# Altium PCB 电子脚铐手表主控板V3-改版.PcbDoc
Units mil, origin at the board's own origin, x right, y up, seen from the top; angles counter-clockwise.
Board outline 1259.84 x 1023.62 mil, 2 copper layers (Top Layer, Bottom Layer), stack 42.17 mil thick; 41 components, 29 nets, 164 pads, 44 vias.
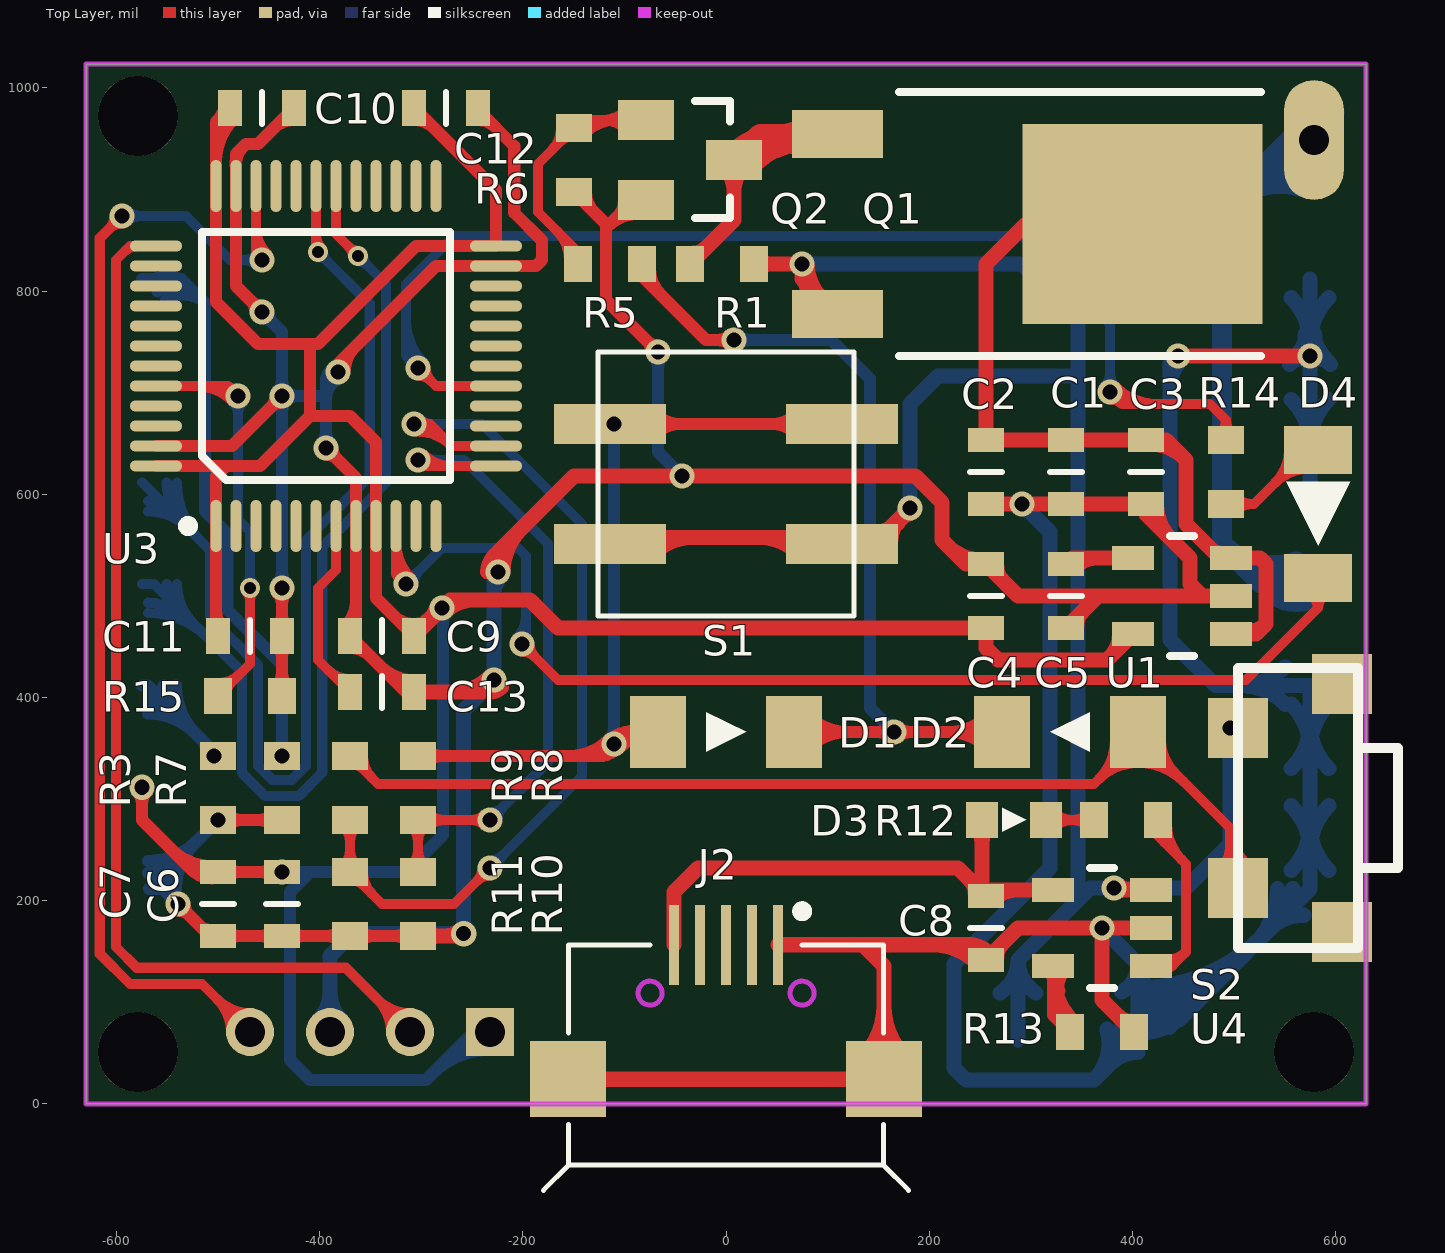
[diagram p0: Top Layer view]
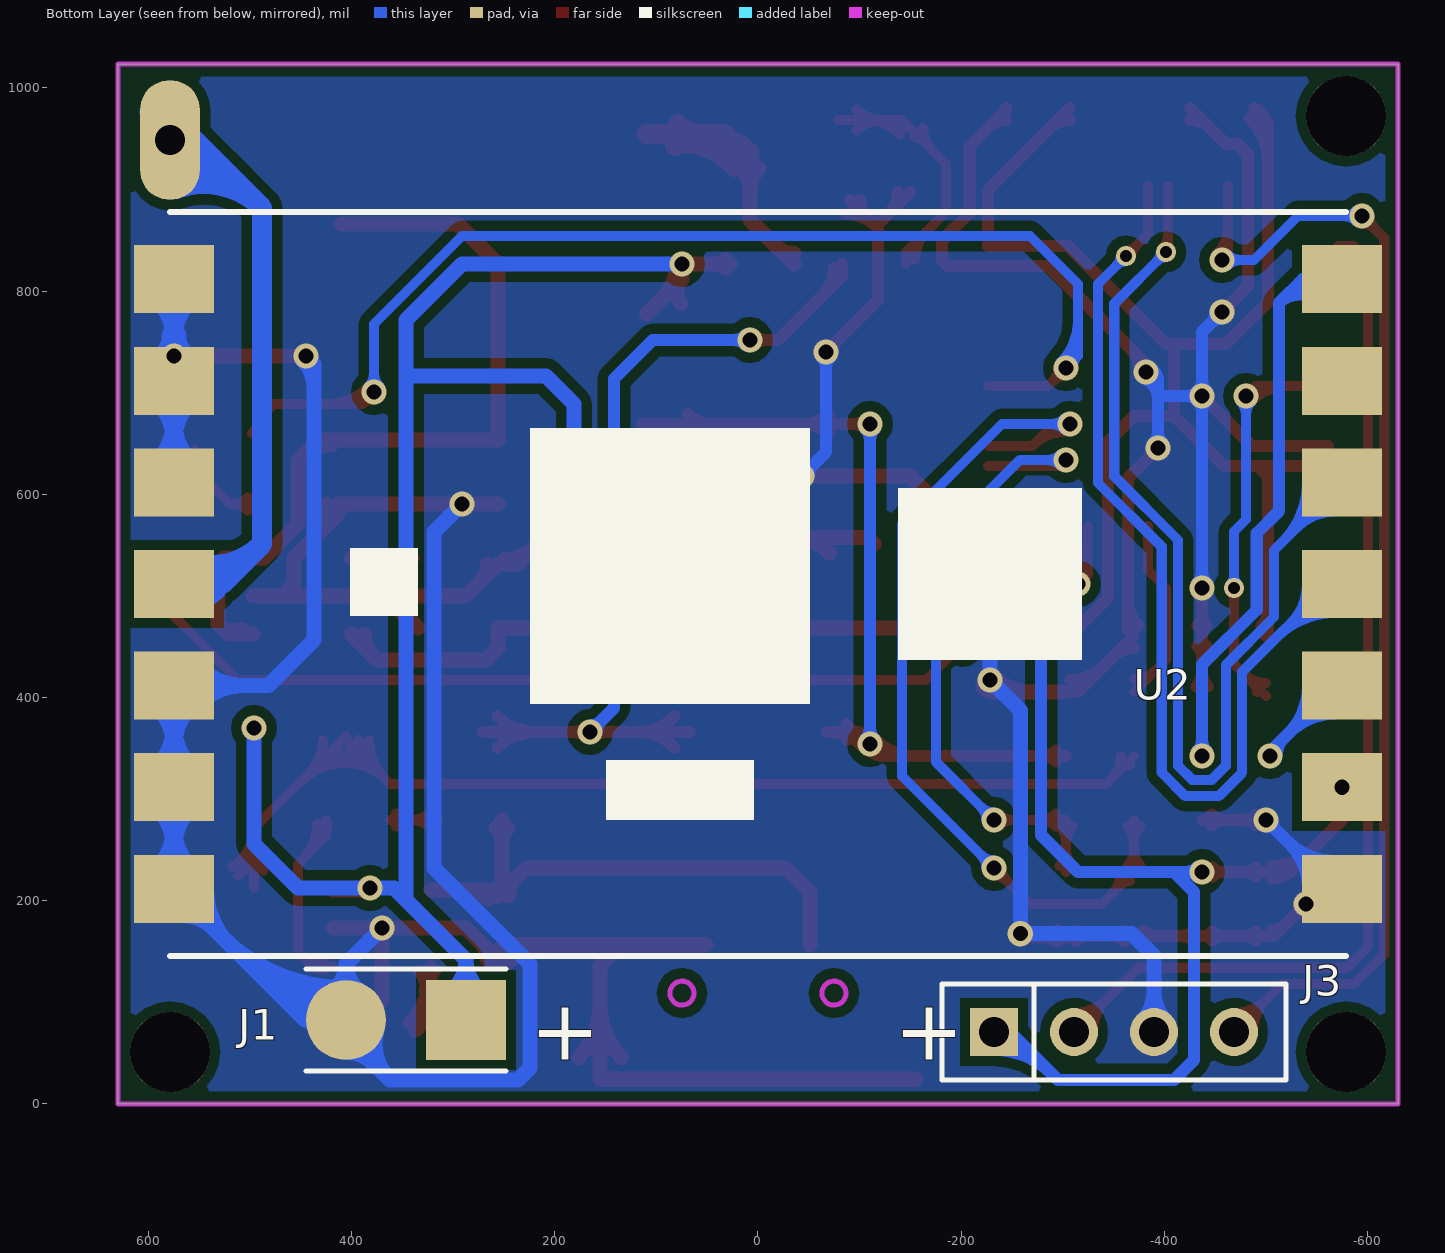
[diagram p1: Bottom Layer view, seen from below]
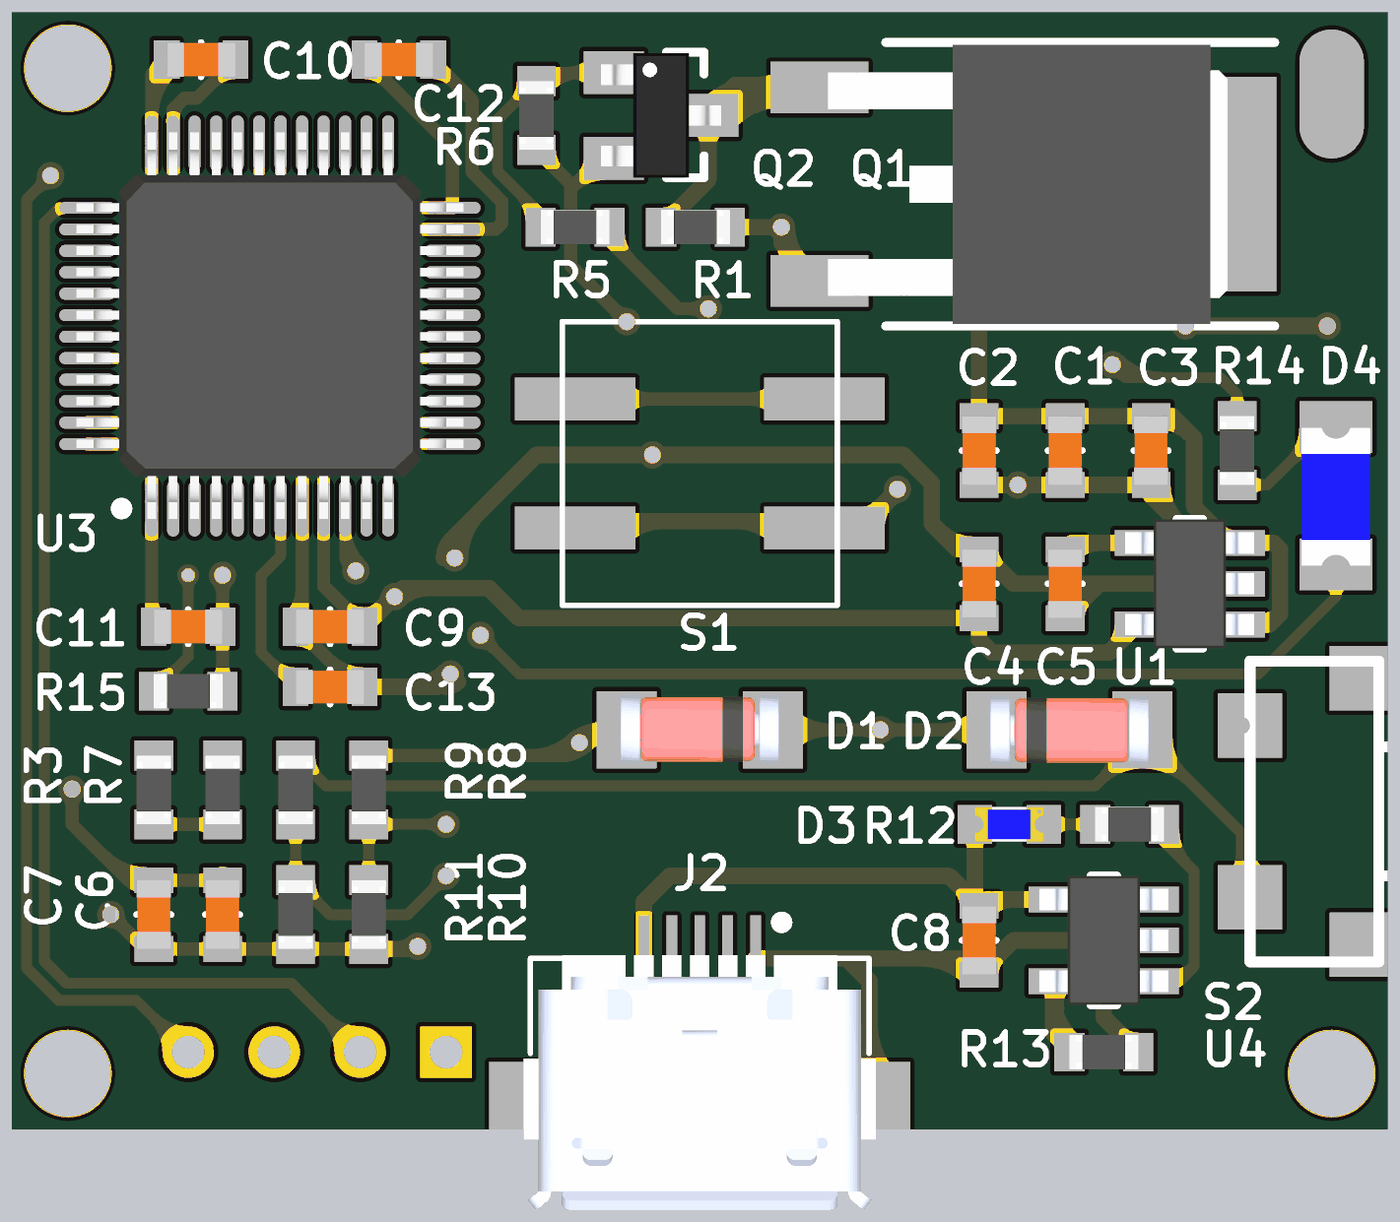
[diagram p2: 3D render of the assembled board from above, using the file's embedded part models]

## Layer stack, top to bottom
Top Solder: solder mask 0.4, Solder Resist, Dk 3.5
Top Layer: signal copper 1.4
Dielectric 1: dielectric 39.3701, FR-4, Dk 4.8
Bottom Layer: signal copper 1.4
Bottom Solder: solder mask 0.4, Solder Resist, Dk 3.5

## Board outline
-629.92,0 629.92,0 629.92,1023.62 -629.92,1023.62

## Design rules (kind name [scope] priority, off if disabled: settings)
Clearance [All] p1: gap=6
ComponentClearance [All] p1: gap=0 collisioncheckmode=3 verticalgap=0 showdistances=FALSE
Height [All] p1: minheight=0 maxheight=2000 prefheight=500
HoleSize [All] p1: absolutevalues=TRUE maxlimit=200 minlimit=1 maxpercent=80.000 minpercent=20.000
HoleToHoleClearance [All] p1: gap=6 allowstackedmicrovias=TRUE
MinimumSolderMaskSliver [All] p1: minsoldermaskwidth=0
PlaneConnect [All] p1: planeconnectstyle=Direct reliefexpansion=20 reliefentries=4 reliefconductorwidth=10 reliefairgap=10
PolygonConnect [All] p1: connectstyle=Direct reliefconductorwidth=10 reliefentries=4 polygonreliefangle="90 Angle" airgapwidth=10
RoutingVias [All] p1: holewidth=28 width=50 viastyle="Through Hole" minholewidth=8 minwidth=12 maxholewidth=200 maxwidth=300
SilkToSilkClearance [All] p1: silktosilkclearance=0
SilkToSolderMaskClearance [IsPad] p1: minsilkscreentomaskgap=0 clearancetoexposedcopper=TRUE
SolderMaskExpansion [All] p1: expansion=4
Width [All] p1: maxlimit=20 minlimit=10 preferedwidth=10
21 further rules are at their usual default settings.

## Components (designator, comment, footprint, x,y, rotation, side; value= is the part's Value field where it differs from the comment)
C1 "10uF" C0603 334.65,622.05 r270 top locked
C2 "10uF" C0603 255.91,622.05 r270 top locked
C3 "0.1uF" C0603 413.39,622.05 r90 top locked
C4 "10uF" C0603 255.91,500 r90 top locked
C5 "470pF" C0603 334.65,500 r270 top locked
C6 "10uF" C0603 -437.01,196.85 r270 top locked
C7 "0.1uF" C0603 -500,196.85 r270 top locked
C8 "10uF" C0603 255.91,173.23 r270 top locked
C9 "0.1uF" C0603 -338.58,460.63 r180 top locked
C10 "0.1uF" C0603 -456.69,980.31 r0 top locked
C11 "0.1uF" C0603 -468.5,460.63 r0 top locked
C12 "0.1uF" C0603 -275.59,980.31 r0 top locked
C13 "0.1uF" C0603 -338.58,405.51 r0 top locked
D1 "1N4148" SOD-80-S 0,366.14 r0 top
D2 "1N4148" SOD-80-S 338.58,366.14 r180 top locked
D3 "LED-G" LED0603 283.46,279.53 r0 top locked
D4 "LED" Led1206 582.68,580.71 r270 top locked
J1 "Jack 1x2" JK1*2-2.0 346.46,82.68 r0 bottom locked
J2 "MicroUSB" MICRO-USB 0,90.55 r180 top locked
J3 "SHD1X4-2.00" Jk1*4-2.0 -350.39,70.87 r180 bottom
Q1 "2SA1615" TO-252 259.84,866.14 r270 top locked
Q2 "S8050" SOT-23 -35.43,929.13 r270 top locked
R1 "200K" R0603 -3.94,826.77 r180 top locked
R3 "200K" R0603 -500,311.02 r270 top locked
R5 "20K" R0603 -114.17,826.77 r180 top locked
R6 "10K" R0603 -149.61,929.13 r270 top locked
R7 "200K" R0603 -437.01,311.02 r270 top locked
R8 "200K" R0603 -303.15,311.02 r270 top locked
R9 "200K" R0603 -370.08,311.02 r270 top locked
R10 "100K" R0603 -303.15,196.85 r90 top locked
R11 "100K" R0603 -370.08,196.85 r90 top locked
R12 "1K" R0603 393.7,279.53 r180 top locked
R13 "1.65K" R0603 370.08,70.87 r180 top locked
R14 "1K" R0603 492.13,622.05 r270 top locked
R15 "100K" R0603 -468.5,401.57 r0 top locked
S1 "Switch" TS-1110U 0,610.24 r180 top locked
S2 "Switch" SIDE_BUTTON 503.94,429.13 r0 top
U1 "MIC5219-3.3YM5" SOT-23-5 448.82,500 r180 top locked
U2 "YL-800TS" YL-800TS 0,511.81 r0 bottom locked
U3 "STM32F103CB" LQFP48 -393.7,736.22 r90 top locked
U4 "SE9016" SOT-23-5 370.08,173.23 r180 top locked

## Footprints (in the part's own frame and the unit in brackets; to place one, negate y for a bottom-side part, rotate by r counter-clockwise, add the part's x,y. Pads: shape width x height; smd on the part's side, far side on the other; paste and mask are expansions set on the pad)
C0603 [mm]
  rect 0.6x0.9 smd: 1(-0.8,0) 2(0.8,0)
  silkscreen extent 0,-0.4 0,0.4, body extent -0.8,-0.4 0.8,0.4, height 0.5
JK1*2-2.0 [mm]
  rect 2x2 smd: 1(-1.5,0)
  round 2 smd: 2(1.5,0)
  silkscreen extent -2.5,-1.27 2.5,1.27
Jk1*4-2.0 [mm] "4P，直插，2.0mm间距，排母"
  rect 1.2x1.2 hole 0.762: 1(-3,0)
  round 1.2 hole 0.762: 2(-1,0) 3(1,0) 4(3,0)
  silkscreen extent -4.3,-1.2 4.3,1.2, body extent -4.25,-1.22 4.25,1.18, height 4.3
LED0603 [mm]
  rect 0.8x0.9 smd: 1(-0.8,0) 2(0.8,0)
  silkscreen extent -0.3,-0.3 0.3,0.3, body extent -0.8,-0.4 0.8,0.4, height 0.6
Led1206 [mm]
  rect 1.2x1.7 smd: 1(-1.6,0) 2(1.6,0)
  silkscreen extent -0.8,-0.8 0.8,0.8, body extent -1.57,-0.8 1.63,0.8, height 1.1
LQFP48 [mm]
  oval 1.3x0.28 smd: 1(-4.25,2.75) 2(-4.25,2.25) 3(-4.25,1.75) 4(-4.25,1.25) 5(-4.25,0.75) 6(-4.25,0.25) 7(-4.25,-0.25) 8(-4.25,-0.75) 9(-4.25,-1.25) 10(-4.25,-1.75) 11(-4.25,-2.25) 12(-4.25,-2.75) 25(4.25,-2.75) 26(4.25,-2.25) 27(4.25,-1.75) 28(4.25,-1.25) 29(4.25,-0.75) 30(4.25,-0.25) 31(4.25,0.25) 32(4.25,0.75) 33(4.25,1.25) 34(4.25,1.75) 35(4.25,2.25) 36(4.25,2.75)
  oval 0.28x1.3 smd: 13(-2.75,-4.25) 14(-2.25,-4.25) 15(-1.75,-4.25) 16(-1.25,-4.25) 17(-0.75,-4.25) 18(-0.25,-4.25) 19(0.25,-4.25) 20(0.75,-4.25) 21(1.25,-4.25) 22(1.75,-4.25) 23(2.25,-4.25) 24(2.75,-4.25) 37(2.75,4.25) 38(2.25,4.25) 39(1.75,4.25) 40(1.25,4.25) 41(0.75,4.25) 42(0.25,4.25) 43(-0.25,4.25) 44(-0.75,4.25) 45(-1.25,4.25) 46(-1.75,4.25) 47(-2.25,4.25) 48(-2.75,4.25)
  silkscreen extent -4.37,-3.1 3.1,3.57, body extent -4.49,-4.5 4.51,4.5, height 1.8
MICRO-USB [mm]
  rect 0.25x2 smd: 1(1.3,-1.679) 2(0.65,-1.679) 3(0,-1.679) 4(-0.65,-1.679) 5(-1.3,-1.679)
  rect 1.9x1.9 smd: 5(-3.95,1.679) 5(3.95,1.679)
  Keep-Out Layer circle w0.127: c-1.9,-0.471 r0.3
  Keep-Out Layer circle w0.127: c1.9,-0.471 r0.3
  silkscreen extent -4.57,-2.64 4.57,4.46, body extent -4.1,-1.75 4.1,4.18, height 2.77
R0603 [mm]
  rect 0.7x0.9 smd: 1(-0.8,0) 2(0.8,0)
  body extent -0.8,-0.4 0.8,0.4, height 0.37
SIDE_BUTTON [mm] "SMD Button Side Activated"
  rect 1.5x1.5 smd: 1(0,-1.5) 2(0,-5.5) ""(2.6,-6.6) ""(2.6,-0.4)
  silkscreen extent 0,-7 4,0, body extent 0,-7 4,0, height 3.5
SOD-80-S [mm]
  rect 1.4x1.8 smd: 1(-1.7,0) 2(1.7,0)
  silkscreen extent -0.5,-0.5 0.5,0.5, body extent -1.85,-0.79 1.85,0.81, height 1.6
SOT-23 [mm]
  rect 1x1.4 smd: 1(-1,-1.1) 2(1,-1.1) 3(0,1.1)
  silkscreen extent -1.47,0.13 1.45,1, body extent -1.45,-1.4 1.45,1.4, height 1.3
SOT-23-5 [mm]
  rect 1.05x0.6 smd: 1(-1.225,0.95) 2(-1.225,0) 3(-1.225,-0.95) 4(1.225,-0.95) 5(1.225,0.95)
  silkscreen extent -0.3,-1.5 0.3,1.5, body extent -1.5,-1.5 1.5,1.5, height 1.2
TO-252 [mm]
  rect 1.2x2.28 smd: 1(-2.25,-3.816) 3(2.25,-3.816)
  rect 5x6 smd: 2(0,3.816)
  silkscreen extent -3.3,-2.27 3.3,6.78, body extent -3.25,-3.62 3.25,5.68, height 2.3
TS-1110U [mm]
  rect 2.8x1 smd: 1(-2.9,1.5) 1(2.9,1.5) 2(-2.9,-1.5) 2(2.9,-1.5)
  silkscreen extent -3.2,-3.3 3.2,3.3, body extent -3.2,-3.3 3.2,3.3, height 4.95
YL-800TS [mm]
  rect 2x1.7 smd: 1(-14.6,7.62) 2(-14.6,5.08) 3(-14.6,2.54) 4(-14.6,0) 5(-14.6,-2.54) 6(-14.6,-5.08) 7(-14.6,-7.62) 8(14.6,-7.62) 9(14.6,-5.08) 10(14.6,-2.54) 11(14.6,0) 12(14.6,2.54) 13(14.6,5.08) 14(14.6,7.62)
  silkscreen extent -14.7,-9.3 14.7,9.3, body extent -14.7,-9.3 14.7,9.3, height 2.3

## Part data
C1 C2 C4 C5 C6 C7: library part CAP, "CAP"
C3 C9 C10 C11 C12 C13: library part "Cap Semi"
C8: library part Cap, "Capacitor"
D1 D2: library part DIODE-SWITCHING, "Silicon Epitaxial Planar Diodes"
D3: library part LED
J1: "插座"
J3: library part HEADER1X4
Q1: library part MJD122
Q2: "NPN triode, 0.5A Max"
R1 R5 R6 R8 R9 R15: library part Res
R3 R7 R10 R11: library part RES, "Resistor"
R12 R13 R14: library part Res, "Resistor"
S1 S2: library part Sw
U1: library part MIC5205
U3: library part STM32F103Cx

## Free pads (board coordinates)
  round 78.74 hole 78.74: ""(-578.74,51.18) ""(-578.74,972.44) ""(578.74,51.18)
  oval 59.06x118.11 smd: ""(578.74,948.82)
  oval 59.06x118.11 smd far side: ""(578.74,948.82)

## Via types
v1: diameter 25, hole 15, Top Layer to Bottom Layer, tented both sides, 40 vias
v2: diameter 20, hole 12, Top Layer to Bottom Layer, tented both sides, 3 vias
v3: diameter 50, hole 30, Top Layer to Bottom Layer, tented both sides, 1 vias

## Nets (pads, with @x,y where several pads share a name; then routed paths per layer and width w, separated by ;. In a path a pad name is that pad's centre, name@x,y a point inside that pad or via, vN(x,y) a via of type N, cw(c..) or ccw(c..) an arc to the next point about the centre after c; other vN are vias at no path point)
+3.3V: C4.1 C6.1 C7.1 C9.1 C10.1 C11.1 C12.1 J3.1 U1.5 U2.2 U3.1 U3.9 U3.24 U3.36 U3.48 | length 3751.4
  Top Layer w12: v1@-579.4,307.21 cw(c-590.5,296.12) -574.8,296.12 cw(c-559.11,296.12) v1@-570.21,307.21 ; v1(-574.8,311.81) -574.8,279.53 -523.62,228.35 C7.1 v1(-437.01,228.35) ; U3.48 -492.13,627.95 ; -546.07,250.79 ccw(c-505.91,290.96) C7.1@-505.91,234.16 ; -525.58,230.31 ccw(c-505.91,249.99) C7.1@-505.91,222.16 ; C7.1@-510.01,224.24 ccw(c-519.93,214.32) -519.93,228.35 ccw(c-519.93,242.38) C7.1@-510.01,232.46 ; -501.97,485.32 ccw(c-481.22,485.32) C11.1@-495.89,470.64 ; U3.36@-501.97,927.11 cw(c-440.89,927.11) C10.1@-484.08,970.3 ; -501.97,956.08 cw(c-469.86,956.08) C10.1@-492.57,978.79 ; C11.1 -501.97,462.6 U3.1 -501.97,618.11 -492.13,627.95 ; C10.1@-490.29,968.99 ccw(c-494.25,958.82) -501.97,966.54 ; C7.1@-489.99,224.24 cw(c-480.07,214.32) -480.07,228.35 cw(c-480.07,242.38) C7.1@-489.99,232.46 ; C10.1 -501.97,966.54 ; C6.1@-447.02,224.24 ccw(c-456.94,214.32) -456.94,228.35 ccw(c-456.94,242.38) C6.1@-447.02,232.46 ; C6.1@-441.61,223.75 ccw(c-452.7,212.65) -452.7,228.35 ccw(c-452.7,244.04) C6.1@-441.61,232.94 ; -327.09,480.63 ccw(c-307.09,500.63) C9.1@-307.09,472.35 ; C9.1 -344.49,498.03 U3.9 -344.49,651.57 -370.08,677.17 -409.45,677.17 ; C12.1@-307.09,968.6 cw(c-307.09,940.31) -287.09,960.31 ; C12.1 -226.38,899.61 U3.24 -305.12,844.49 -401.57,748.03 -409.45,748.03 ; -501.97,966.54 U3.36 -501.97,789.37 -460.63,748.03 -409.45,748.03 ; -492.13,627.95 -458.66,627.95 -409.45,677.17 ; -409.45,677.17 -409.45,748.03
  Top Layer w15: C9.1 v1(-279.53,488.19) -271.65,496.06 -192.91,496.06 -165.35,468.5 C4.1 255.91,448.82 267.72,437.01 375,437.01 U1.5 ; C9.1@-307.09,470.85 ccw(c-307.09,495.51) -289.65,478.07 ; C9.1@-295.87,474.48 ccw(c-308.23,495.88) v1@-284.36,489.48 ; -291.5,477 ccw(c-298.49,489.11) v1@-284.52,488.43 ; v1@-275.99,484.65 cw(c-248.45,457.11) -248.45,496.06 ; 378.11,440.12 ccw(c355.63,462.6) U1.5@387.42,462.6
  Bottom Layer w12: v1(-437.01,228.35) -409.45,228.35 ; v1@-432.41,223.75 cw(c-421.32,212.65) -421.32,228.35 cw(c-421.32,244.04) v1@-432.41,232.94 ; -289.25,29.65 cw(c-232.28,-27.32) J3.1@-232.28,53.24 ; v1@-284.12,483.59 cw(c-297.34,470.38) -278.65,470.38 ; -278.65,474.62 cw(c-265.95,474.62) v1@-274.93,483.59 ; v1@-271.65,492.12 -278.65,485.13 -278.65,264.66 -314.96,228.35 -409.45,228.35 ; -268.76,50.13 cw(c-232.28,13.65) J3.1@-232.28,65.24 ; J3.1@-248.03,70.87 -295.28,23.62 -409.45,23.62 -429.13,43.31 -429.13,208.66 -409.45,228.35
AD_KEY1: R8.2 R10.2 U3.13 | length 874.2
  Top Layer w10: R10.2@-309.36,234.55 ccw(c-324.35,249.54) -303.15,249.54 ccw(c-281.95,249.54) R10.2@-296.94,234.55 ; R8.2@-309.36,273.32 cw(c-324.35,258.33) -303.15,258.33 cw(c-281.95,258.33) R8.2@-296.94,273.32 ; R10.2 R8.2 v1(-232.28,279.53) ; v1(-303.15,633.86) -297.24,627.95 U3.13 ; v1@-297.85,639.16 ccw(c-270.79,666.22) -270.79,627.95 ; R8.2@-293,273.32 cw(c-278.02,258.33) -278.02,279.53 cw(c-278.02,300.72) R8.2@-293,285.74 ; v1@-237.59,274.22 ccw(c-250.39,261.42) -250.39,279.53 ccw(c-250.39,297.63) v1@-237.59,284.83
  Bottom Layer w10: v1(-303.15,633.86) -257.78,633.86 -175.1,551.18 -175.1,336.71 v1(-232.28,279.53) ; v1@-297.85,628.55 cw(c-285.04,615.75) -285.04,633.86 cw(c-285.04,651.96) v1@-297.85,639.16 ; v1@-232.28,287.03 ccw(c-232.28,305.13) -219.48,292.33 ccw(c-206.68,279.53) v1@-224.78,279.53
AD_KEY2: R9.2 R11.2 U3.14 | length 1161.2
  Top Layer w10: R11.2@-376.29,234.55 ccw(c-391.27,249.54) -370.08,249.54 ccw(c-348.88,249.54) R11.2@-363.87,234.55 ; R9.2@-376.29,273.32 cw(c-391.27,258.33) -370.08,258.33 cw(c-348.88,258.33) R9.2@-363.87,273.32 ; R9.2 R11.2 -338.59,196.86 -267.71,196.86 v1(-232.28,232.28) ; R11.2@-366.14,219.57 cw(c-366.14,207.88) R11.2@-357.88,216.14 ; R11.2@-357.36,228.35 ccw(c-326.66,228.35) -348.37,206.64 ; v1@-307.22,671.79 cw(c-305.68,643.33) -285.53,663.48 ; v1(-307.09,669.29) -291.34,669.29 ; v1@-306.68,661.8 cw(c-304.05,613.28) -269.69,647.64 ; v1@-301.26,664.56 cw(c-291.34,656.51) -291.34,669.29 ; v1@-301.26,674.02 ccw(c-291.34,682.07) -291.34,669.29 ; v1@-239.78,232.28 cw(c-257.89,232.28) -245.09,219.48 cw(c-232.28,206.68) v1@-232.28,224.78 ; U3.14 -269.69,647.64 ; -291.34,669.29 -269.69,647.64
  Bottom Layer w10: v1(-307.09,669.29) -240.16,669.29 -141.73,570.87 -141.73,322.83 v1(-232.28,232.28) ; v1@-301.78,663.99 cw(c-288.98,651.18) -288.98,669.29 cw(c-288.98,687.4) v1@-301.78,674.59 ; v1@-232.28,239.78 ccw(c-232.28,257.89) -219.48,245.09 ccw(c-206.68,232.28) v1@-224.78,232.28
ANT: pad.@578.74,948.82 U2.11 | length 1189.9
  Bottom Layer w20: 510.59,904.3 cw(c556.98,857.91) pad.@578.9,919.74 ; 510.98,528.39 ccw(c550.1,567.51) U2.11@567.79,515.09 ; 512.81,906.51 cw(c578.74,840.58) pad.@578.74,933.82 ; 533,926.7 cw(c568.71,890.99) pad.@585.58,938.59 ; 533.76,505.61 ccw(c561.6,533.44) U2.11@574.19,496.14 ; 546.95,940.65 cw(c578.74,908.86) pad.@578.74,953.82 ; U2.11@548.75,499.78 ccw(c527.56,487.13) 527.56,511.81 ; U2.11@548.75,523.84 cw(c527.56,536.49) 527.56,511.81 ; pad.@555.4,949.1 cw(c580.44,924.07) pad.@592.27,957.44 ; U2.11@561.39,534.04 cw(c538.6,601.59) 488.19,551.18 ; pad.@572.21,900.89 ccw(c545.25,824.83) 488.19,881.89 ; U2.11 527.56,511.81 ; pad.@577.81,971.51 cw(c592.16,957.15) pad.@598.95,976.29 ; pad.@578.74,972.44 488.19,881.89 ; 488.19,551.18 488.19,881.89 ; 488.19,551.18 527.56,511.81
  other v3: 578.74,948.82
BAT: J1.1 Q1.3 R1.1 S1.1 S2.1 U4.3 | length 2383.2
  Top Layer w15: S1.1@-114.17,551.18 -107.86,557.5 107.86,557.5 114.17,551.18 145.67,551.18 v1(181.1,586.61) ; S1.1@-70.12,542.56 cw(c-34.08,506.52) -34.08,557.5 ; R1.1 v1(74.8,826.77) 74.8,812.36 ; R1.1@32,822.33 cw(c42.72,811.61) 42.72,826.77 cw(c42.72,841.93) R1.1@32,831.21 ; 34.08,557.5 cw(c34.08,506.52) S1.1@70.12,542.56 ; Q1.3@75.94,787.86 ccw(c61.93,799.48) 74.8,812.36 ; v1@79.8,826.77 ccw(c126.66,826.77) Q1.3@93.53,793.64 ; Q1.3 74.8,812.36 ; S1.1@149.61,563.37 ccw(c149.61,583.28) S1.1@163.69,569.2 ; S1.1@161.79,551.18 cw(c200.71,551.18) v1@173.19,578.7 ; 169.06,571.55 cw(c188.08,560.58) v1@182.4,581.78 ; v1(381.89,212.6) 379.92,210.63 U4.3 ; v1@385.43,216.13 ccw(c398.71,229.42) U4.3@398.71,210.63
  Bottom Layer w15: v1(74.8,826.77) 291.34,826.77 346.46,771.65 346.46,716.54 ; v1(181.1,586.61) 181.1,688.98 208.66,716.54 346.46,716.54 ; J1.1@269.91,109.32 ccw(c248.63,141.73) 287.4,141.73 ; J1.1@287.4,62.99 287.4,141.73 ; J1.1@304.89,109.32 cw(c326.18,141.73) 287.4,141.73 ; v1(496.06,370.08) 496.06,255.91 452.76,212.6 v1(381.89,212.6) 358.27,212.6 346.46,200.79 ; 287.4,141.73 346.46,200.79 ; 346.46,200.79 346.46,716.54
BATOUT: C1.1 C2.1 C3.2 Q1.2 U1.1 U1.3 | length 876.8
  Top Layer w15: Q1.2 295.28,866.14 255.91,826.77 C2.1 C1.1 C3.2 433.07,653.54 452.76,633.86 452.76,570.87 486.22,537.4 U1.3 525.59,537.4 531.5,531.5 531.5,472.44 ; C3.2@419.29,649.23 cw(c419.29,605.56) 450.17,636.44 ; U1.3@477.47,546.15 ccw(c488.19,556.87) U1.3@488.19,541.71 ; U1.1 521.65,462.6 531.5,472.44 ; U1.1@507.26,466.69 ccw(c514.72,489.22) 531.5,472.44
BOOT0: R15.1 U3.44 | length 578
  Top Layer w10: U3.44 -490.16,706.69 ; -522.18,706.69 cw(c-522.18,654.98) v1@-485.62,691.55 ; R15.1 -468.5,433.07 v2(-468.5,507.87) ; R15.1@-500,414.29 ccw(c-500,444.99) -478.29,423.28 ; -498.04,706.69 cw(c-498.04,679.12) v1@-478.55,698.62 ; R15.1@-491.22,405.51 cw(c-479.53,405.51) R15.1@-487.8,413.78 ; v1@-487.66,698.36 ccw(c-496.64,700.21) -490.16,706.69 ; v1@-481.83,704.2 cw(c-483.68,713.17) -490.16,706.69 ; v1(-480.31,696.85) -490.16,706.69 ; v2@-472.04,504.34 cw(c-480.57,495.8) -468.5,495.8 cw(c-456.43,495.8) v2@-464.97,504.34
  Bottom Layer w10: v1@-485.62,691.55 cw(c-498.42,678.74) -480.31,678.74 cw(c-462.21,678.74) v1@-475.01,691.55 ; v1(-480.31,696.85) -480.31,575.22 -468.5,563.41 v2(-468.5,507.87) ; v2@-472.04,511.41 ccw(c-480.57,519.95) -468.5,519.95 ccw(c-456.43,519.95) v2@-464.97,511.41
GND: C1.2 C2.2 C3.1 C4.2 C5.2 C6.2 C7.2 C8.2 C9.2 C10.2 C11.2 C12.2 C13.2 J1.2 J2.5 J3.3 Q2.2 R3.2 R6.2 R7.2 R10.1 R11.1 R13.1 R15.2 U1.2 U2.1 U2.8 U2.9 U2.10 U2.12 U2.13 U2.14 U3.8 U3.23 U3.35 U3.47 U4.2 | length 10859.6
  Top Layer w12: U3.47 -486.22,647.64 v1(-437.01,696.85) ; v1@-539.37,190.35 cw(c-539.37,174.66) -528.27,185.75 cw(c-517.18,196.85) v1@-532.87,196.85 ; v1(-539.37,196.85) -507.87,165.35 C7.2 C6.2 R11.1 R10.1 ; -519.19,176.67 ccw(c-505.91,189.95) C7.2@-505.91,171.17 ; v1(-500,279.53) R7.2 ; R3.2@-495.4,274.93 cw(c-484.3,263.83) -484.3,279.53 cw(c-484.31,295.21) R3.2@-495.4,284.12 ; R3.2@-490.56,274.03 cw(c-477.28,260.75) -477.28,279.53 cw(c-477.28,298.31) R3.2@-490.56,285.03 ; C7.2@-489.99,161.25 cw(c-480.07,151.33) -480.07,165.35 cw(c-480.07,179.38) C7.2@-489.99,169.46 ; U3.35@-482.77,923.62 cw(c-456.39,923.62) -475.04,942.28 ; v1@-463.19,779.53 ccw(c-478.89,779.53) -467.79,790.62 ccw(c-456.69,801.72) v1@-456.69,786.03 ; v1(-456.69,779.53) -482.28,805.12 U3.35 -482.28,935.04 -472.44,944.88 -460.63,944.88 C10.2 ; C6.2@-447.02,161.25 ccw(c-456.94,151.33) -456.94,165.35 ccw(c-456.94,179.38) C6.2@-447.02,169.46 ; R7.2@-446.45,274.03 ccw(c-459.73,260.75) -459.73,279.53 ccw(c-459.73,298.31) R7.2@-446.45,285.03 ; -445.2,960.31 cw(c-425.2,940.31) C10.2@-425.2,968.6 ; v1@-443.51,696.85 cw(c-459.2,696.85) -448.1,685.75 cw(c-437.01,674.66) v1@-437.01,690.35 ; R15.2@-442.51,411.01 ccw(c-455.79,424.29) -437.01,424.29 ccw(c-418.23,424.29) R15.2@-431.51,411.01 ; v1@-441.6,503.28 cw(c-452.7,492.18) -437.01,492.18 cw(c-421.32,492.18) v1@-432.41,503.28 ; C11.2@-441.12,450.62 cw(c-451.04,440.7) -437.01,440.7 cw(c-422.98,440.7) C11.2@-432.9,450.62 ; C11.2@-441.12,470.64 ccw(c-451.04,480.56) -437.01,480.56 ccw(c-422.98,480.56) C11.2@-432.9,470.64 ; R15.2 v1(-437.01,507.87) ; C6.2@-426.99,161.25 cw(c-417.07,151.33) -417.07,165.35 cw(c-417.07,179.38) C6.2@-426.99,169.46 ; v1@-393.7,639.17 cw(c-393.7,623.48) -382.6,634.57 cw(c-371.51,645.67) v1@-387.2,645.67 ; v1(-393.7,645.67) -364.17,616.14 U3.8 -364.17,466.54 C9.2 -314.96,405.51 C13.2 C13.2@-299.21,405.51 ; v1(-381.89,720.47) -381.89,728.35 -285.43,824.8 U3.23 -187.01,824.8 -181.1,830.71 -181.1,849.97 -208.38,877.25 -208.38,942.78 -244.09,978.49 C12.2 ; R11.1@-379.52,159.85 ccw(c-392.8,146.57) -392.8,165.35 ccw(c-392.8,184.14) R11.1@-379.52,170.86 ; v1@-375.39,720.47 cw(c-340.69,720.47) -365.23,745.01 ; C9.2@-374.19,470.64 ccw(c-398.37,494.82) -364.17,494.82 ; C9.2@-370.08,448.91 cw(c-370.08,420.63) -350.08,440.63 ; R11.1@-360.64,159.85 cw(c-347.36,146.57) -347.36,165.35 cw(c-347.36,184.14) R11.1@-360.64,170.86 ; -340.53,431.08 ccw(c-307.09,464.52) C13.2@-307.09,417.23 ; -320.04,410.6 ccw(c-307.09,423.55) C13.2@-307.09,405.23 ; R10.1@-312.59,159.85 ccw(c-325.87,146.57) -325.87,165.35 ccw(c-325.87,184.14) R10.1@-312.59,170.86 ; C12.2@-244.09,968.6 cw(c-244.09,944.71) -227.2,961.6 ; R6.2 -118.11,866.14 -118.11,862.2 ; R6.2@-137.89,897.64 ccw(c-109.6,897.64) -129.6,877.64 ; -116.7,863.62 cw(c-86.61,833.54) Q2.2@-86.61,876.08 ; -107.19,873.12 ccw(c-123.83,889.76) Q2.2@-100.3,889.76 ; Q2.2@-90.55,889.76 -118.11,862.2 ; v1@-73.43,740.16 ccw(c-89.12,740.16) -78.03,751.25 ccw(c-66.93,762.35) v1@-66.93,746.66 ; v1(-66.93,740.16) -118.11,791.34 -118.11,862.2
  Top Layer w15: R10.1 -260.66,165.35 v1(-258.28,167.73) ; C13.2@-299.21,405.51 -240.16,405.51 v1(-228.35,417.32) ; R10.1@-294.77,160.91 cw(c-284.05,150.19) -284.05,165.35 cw(c-284.05,180.51) R10.1@-294.77,169.79 ; -276.1,165.35 ccw(c-276.1,185.54) v1@-261.82,171.27 ; -268.93,405.51 ccw(c-268.93,457.91) v1@-231.88,420.86 ; v1@-234.41,523.62 cw(c-211.03,523.62) -227.56,540.16 ; -232.72,405.51 ccw(c-232.72,421.69) v1@-221.28,410.25 ; v1(-224.41,523.62) -224.41,543.31 -149.61,618.11 v1(-43.31,618.11) 186.38,618.11 212.6,591.89 212.6,555.12 236.22,531.5 C4.2 287.4,500 366.14,500 ; v1@-219.41,523.62 cw(c-159.81,523.62) -201.95,565.76 ; J2.5@-155.51,24.45 155.51,24.45 155.51,135.83 134.69,156.65 ; J2.5@51.18,156.65 134.69,156.65 ; J2.5@134.37,45.59 ccw(c83.32,96.64) 155.51,96.64 ccw(c227.7,96.64) J2.5@176.66,45.59 ; 203.57,156.65 cw(c203.57,95.3) C8.2@246.95,138.68 ; 219.12,548.6 ccw(c250,579.48) C4.2@250,535.81 ; 239.78,156.65 cw(c239.78,131.52) C8.2@257.56,149.29 ; C8.2@245.73,142.35 ccw(c229.1,144.77) 240.99,156.65 ; C2.2 v1(291.34,590.55) C1.2 C3.1 413.39,580.54 456.69,537.23 456.69,511.81 468.5,500 ; C8.2@266.12,141.73 cw(c290.79,141.73) 273.35,159.17 ; C4.2@266.12,531.5 ccw(c290.79,531.5) 273.35,514.06 ; C5.2 366.14,500 ; C5.2@344.86,468.5 cw(c369.53,468.5) 352.09,485.94 ; 384.13,88.31 ccw(c401.57,105.75) R13.1@401.57,81.08 ; R13.1 370.08,102.36 v1(370.08,173.23) ; U4.2 v1(370.08,173.23) ; C3.1@423.6,590.55 ccw(c472.44,590.55) 437.91,556.02 ; v1(444.88,736.22) v1(574.8,736.22) ; U1.2 468.5,500 ; 134.69,156.65 240.98,156.65 ; 240.98,156.65 C8.2 287.4,173.23 v1(370.08,173.23) ; 366.14,500 468.5,500
  Bottom Layer w12: U2.1@-568.9,227.28 ccw(c-568.9,267.47) U2.1@-540.47,239.05 ; U2.1@-568.9,239.28 ccw(c-568.9,308.44) -519.99,259.53 ; U2.1@-553.43,211.81 cw(c-518.96,211.81) U2.1@-543.34,236.19 ; U2.1@-545.87,196.85 ccw(c-561.56,196.85) -550.47,207.95 ccw(c-539.37,219.04) U2.1@-539.37,203.35 ; U2.1@-541.43,211.81 cw(c-477.99,211.81) -522.85,256.67 ; v1(-539.37,196.85) -554.33,211.81 -567.71,211.81 v1(-500,279.53) ; v1@-506.5,279.53 cw(c-522.19,279.53) -511.09,268.43 cw(c-500,257.33) v1@-500,273.03 ; v1@-456.69,773.03 cw(c-456.69,757.34) -445.6,768.43 cw(c-434.5,779.53) v1@-450.19,779.53 ; v1(-456.69,779.53) -437.01,759.84 v1(-437.01,696.85) ; v1@-441.6,512.47 ccw(c-452.7,523.57) -437.01,523.57 ccw(c-421.32,523.57) v1@-432.41,512.47 ; v1@-441.6,692.25 cw(c-452.7,681.16) -437.01,681.16 cw(c-421.32,681.16) -432.41,692.25 cw(c-421.32,681.16) -421.32,696.85 cw(c-421.32,712.54) -432.41,701.45 cw(c-421.32,712.54) -437.01,712.54 cw(c-452.7,712.54) v1@-441.6,701.45 ; v1(-437.01,507.87) v1(-437.01,696.85) ; v1@-398.3,650.27 ccw(c-409.39,661.36) -393.7,661.36 ccw(c-378.01,661.36) v1@-389.1,650.27 ; v1(-393.7,645.67) -393.7,696.85 ; -393.7,694.06 cw(c-372,694.06) v1@-379.61,714.39 ; -393.7,711.37 cw(c-378.48,711.37) v1@-383.82,725.62 ; v1(-381.89,720.47) -393.7,708.66 -393.7,696.85 ; v1@-71.53,735.56 cw(c-82.62,724.47) -66.93,724.47 cw(c-51.24,724.47) v1@-62.33,735.56 ; v1(-66.93,740.16) -66.93,641.73 v1(-43.31,618.11) ; v1@-49.81,618.11 ccw(c-65.5,618.11) -54.4,629.21 ccw(c-43.31,640.3) v1@-43.31,624.61 ; v1(-437.01,696.85) -393.7,696.85
  Bottom Layer w15: J3.3@-401.16,82.27 ccw(c-428.69,109.79) -389.76,109.79 ccw(c-350.84,109.79) J3.3@-378.36,82.27 ; J3.3 -389.76,145.68 -367.71,167.73 v1(-258.28,167.73) -258.28,387.39 v1(-228.35,417.32) -228.35,519.68 v1(-224.41,523.62) ; -228.35,502.05 cw(c-202.83,502.05) v1@-220.87,520.09 ; v1(291.34,590.55) 318.9,562.99 318.9,232.28 224.41,137.8 224.41,35.43 236.22,23.62 362.2,23.62 ; v1(370.08,173.23) 405.51,137.8 ; J1.2@374.94,73.66 cw(c326.47,59.36) 362.21,23.62 ; 377.99,39.41 cw(c405.51,11.88) J1.2@405.51,50.81 ; 380.06,41.48 ccw(c354.04,67.49) J1.2@389.33,77.9 ; J1.2@389.61,110.3 ccw(c373.79,137.79) 405.51,137.79 ; J1.2@405.51,69.55 ccw(c405.51,134.8) 451.65,88.66 ; J1.2@405.51,84.55 ccw(c405.51,186.01) 477.26,114.27 ; J1.2@405.51,99.55 ccw(c405.51,237.22) 502.86,139.87 ; J1.2@405.51,114.55 ccw(c405.51,288.44) 528.47,165.48 ; J1.2@421.41,110.3 cw(c437.24,137.79) 405.51,137.79 ; J1.2@436.55,75.44 cw(c445.67,73.31) 445.67,82.68 ; J1.2@436.55,89.91 ccw(c445.67,92.04) 445.67,82.68 ; 437.01,705.14 cw(c475.96,705.14) v1@448.42,732.68 ; v1(444.88,736.22) 437.01,728.35 437.01,456.69 481.89,411.81 U2.12 U2.13 U2.14 445.67,82.68 ; 520.4,157.41 ccw(c465.99,211.81) U2.14@542.93,211.81 ; 534.65,171.66 cw(c568.9,137.42) U2.14@568.9,185.85 ; U2.14@546,183.01 ccw(c517.21,211.81) U2.14@557.93,211.81 ; U2.12@550.54,393.45 ccw(c506.21,349.13) 506.21,411.81 ccw(c506.21,474.49) U2.12@550.54,430.17 ; U2.9@554.74,727.97 cw(c565.88,719.33) U2.9@572.47,731.8 ; U2.14@556.44,230.17 ccw(c512.12,274.49) 574.8,274.49 ccw(c637.49,274.49) U2.14@593.16,230.17 ; U2.13@556.44,293.45 cw(c512.12,249.13) 574.8,249.13 cw(c637.49,249.13) U2.13@593.16,293.45 ; U2.13@556.44,330.17 ccw(c512.12,374.49) 574.8,374.49 ccw(c637.49,374.49) U2.13@593.16,330.17 ; U2.12@556.44,393.45 cw(c512.12,349.13) 574.8,349.13 cw(c637.49,349.13) U2.12@593.16,393.45 ; U2.10@556.44,630.17 ccw(c512.12,674.49) 574.8,674.49 ccw(c637.49,674.49) U2.10@593.16,630.17 ; U2.9@556.44,693.45 cw(c512.12,649.13) 574.8,649.13 cw(c637.49,649.13) U2.9@593.16,693.45 ; U2.9@556.44,730.17 ccw(c512.12,774.49) 574.8,774.49 ccw(c637.49,774.49) U2.9@593.16,730.17 ; U2.8@556.44,793.45 cw(c512.12,749.13) 574.8,749.13 cw(c637.49,749.13) U2.8@593.16,793.45 ; 570.3,758.01 ccw(c585.34,753.91) U2.9@577.36,740.52 ; U2.9@572.24,740.52 ccw(c564.27,753.91) 579.3,758.01 ; U2.10 U2.9 v1(574.8,736.22) U2.8 ; U2.9@577.14,731.8 cw(c583.72,719.33) U2.9@594.87,727.97 ; 362.2,23.62 405.51,66.93 J1.2 ; J1.2 405.51,137.8 ; J1.2 445.67,82.68
LEDPOW1: D4.2 U3.10 | length 1344.1
  Top Layer w10: -324.8,529.54 ccw(c-297.23,529.54) v1@-316.73,510.04 ; U3.10@-324.8,553.68 ccw(c-273.09,553.68) v1@-309.66,517.11 ; U3.10 -324.8,521.65 ; v1@-322.31,513.32 ccw(c-331.28,515.17) -324.8,521.65 ; v1@-316.47,519.16 cw(c-318.32,528.13) -324.8,521.65 ; v1(-314.96,511.81) -324.8,521.65 ; v1@-200.79,445.26 cw(c-200.79,427.15) -187.98,439.95 cw(c-175.18,452.76) v1@-193.29,452.76 ; v1(-200.79,452.76) -165.35,417.32 511.81,417.32 582.68,488.19 ; D4.2@574.65,500.91 cw(c568.58,488.19) 582.68,488.19 ; D4.2 582.68,488.19 ; D4.2@590.7,500.91 ccw(c596.77,488.19) 582.68,488.19
  Bottom Layer w10: v1(-314.96,511.81) -279.53,547.24 -204.72,547.24 -196.85,539.37 -196.85,448.82 v1(-200.79,452.76) ; v1@-314.96,519.31 ccw(c-314.96,537.42) -302.16,524.61 ccw(c-289.35,511.81) v1@-307.46,511.81 ; v1@-206.09,458.06 ccw(c-228.4,480.37) -196.85,480.37
LEDPOW2: R14.1 U3.17 | length 1389.5
  Top Layer w10: v1@-303.15,716.91 cw(c-303.15,698.8) -290.35,711.61 cw(c-277.54,724.41) v1@-295.65,724.41 ; v1(-303.15,724.41) -285.43,706.69 U3.17 ; v1@376.19,699.02 ccw(c400.43,723.27) 400.43,688.98 ; v1(377.95,700.79) 389.76,688.98 ; v1@378.39,693.3 cw(c379.26,678.48) 389.76,688.98 ; v1@383.26,706.09 ccw(c424.57,747.41) 424.57,688.98 ; v1@385.44,700.35 ccw(c400.26,699.48) 389.76,688.98 ; R14.1@486.26,660.08 ccw(c474.45,673.23) 492.13,673.23 ; R14.1 492.13,673.23 ; R14.1@497.99,660.08 cw(c509.8,673.23) 492.13,673.23 ; 389.76,688.98 476.38,688.98 492.13,673.23
  Bottom Layer w10: -314.96,746.89 ccw(c-280.67,746.89) v1@-304.92,722.64 ; -314.96,771.03 ccw(c-256.53,771.03) v1@-297.85,729.71 ; v1(-303.15,724.41) -314.96,736.22 -314.96,807.09 -267.72,854.33 291.34,854.33 377.95,767.72 v1(377.95,700.79) ; v1@372.65,706.09 ccw(c359.85,718.89) 377.95,718.89 ccw(c396.06,718.89) v1@383.26,706.09
NetC5_1: C5.1 U1.4 | length 84
  Top Layer w15: C5.1@340.55,537.4 U1.4 ; C5.1@343.6,528.45 cw(c365.22,506.83) 365.22,537.4
NetD1_1: D1.1 R8.1 S1.2 | length 1204.6
  Top Layer w12: R8.1 -122.05,342.52 v1(-110.24,354.33) -98.43,366.14 D1.1 ccw(c-66.93,312.28) v1@-105.57,349.8 ; R8.1@-293.71,337.02 cw(c-280.43,323.74) -280.43,342.52 cw(c-280.43,361.3) R8.1@-293.71,348.02 ; -154.44,342.52 ccw(c-154.44,398.54) v1@-114.83,358.93 ; -125.47,342.52 ccw(c-125.47,369.57) v1@-106.35,350.44 ; v1@-116.74,354.33 cw(c-132.43,354.33) -121.33,343.23 cw(c-110.24,332.14) v1@-110.24,347.83 ; v1@-114.18,358.16 cw(c-95.31,339.84) -95.31,366.14 ; S1.2@-114.17,669.29 v1(-110.24,669.29) S1.2@114.17,669.29 ; v1@-110.24,360.83 ccw(c-110.24,376.52) -99.14,365.43 ccw(c-88.04,354.33) v1@-103.74,354.33 ; S1.2@-105.64,664.7 cw(c-94.54,653.6) -94.54,669.29 cw(c-94.54,684.98) S1.2@-105.64,673.89 ; D1.1@-87.03,358.34 ccw(c-98.42,353.92) -98.42,366.14 ccw(c-98.42,378.37) D1.1@-87.03,373.94 ; S1.2@-69.06,659.61 cw(c-45.7,636.25) -45.7,669.29 cw(c-45.7,702.33) S1.2@-69.06,678.97 ; S1.2@69.06,659.61 ccw(c45.7,636.25) 45.7,669.29 ccw(c45.7,702.33) S1.2@69.06,678.97
  Bottom Layer w12: v1@-114.83,358.93 ccw(c-125.93,370.02) -110.24,370.02 ccw(c-94.54,370.02) v1@-105.64,358.93 ; v1@-114.83,664.7 cw(c-125.93,653.6) -110.24,653.6 cw(c-94.54,653.6) v1@-105.64,664.7 ; v1(-110.24,354.33) v1(-110.24,669.29)
NetD1_2: D1.2 D2.2 R5.1 | length 1156.7
  Top Layer w12: R5.1 -82.68,814.96 -19.69,751.97 v1(7.87,751.97) ; R5.1@-74.9,822.83 ccw(c-37.11,822.83) -63.83,796.11 ; v1@3.28,747.37 ccw(c-7.82,736.28) -7.82,751.97 ccw(c-7.82,767.66) v1@3.28,756.56 ; D1.2 v1(165.35,366.14) D2.2 ; D1.2@82.17,350.9 cw(c118.98,314.09) 118.98,366.14 cw(c118.98,418.19) D1.2@82.17,381.39 ; v1@160.76,361.55 ccw(c149.66,350.45) 149.66,366.14 ccw(c149.66,381.83) v1@160.76,370.74 ; v1@169.95,361.55 cw(c181.05,350.45) 181.05,366.14 cw(c181.05,381.83) v1@169.95,370.74 ; D2.2@256.41,350.9 ccw(c219.61,314.09) 219.61,366.14 ccw(c219.61,418.19) D2.2@256.41,381.39
  Bottom Layer w12: v1(7.87,751.97) 103.54,751.97 141.73,713.78 141.73,389.76 v1(165.35,366.14) ; v1@12.47,747.37 cw(c23.57,736.28) 23.57,751.97 cw(c23.57,767.66) v1@12.47,756.56 ; v1@158.85,366.14 ccw(c143.16,366.14) 154.26,377.24 ccw(c165.35,388.33) v1@165.35,372.64
NetD2_1: D2.1 R9.1 S2.2 | length 1384.3
  Top Layer w10: R9.1 -342.52,314.96 362.2,314.96 405.51,358.27 405.51,362.2 496.06,271.65 ; R9.1@-366.14,333.74 cw(c-366.14,322.05) R9.1@-357.88,330.32 ; R9.1@-357.36,342.52 ccw(c-326.66,342.52) -348.37,320.81 ; D2.1@382.95,358.27 cw(c328.49,358.27) 367,319.76 cw(c405.51,281.25) 405.51,335.71 cw(c405.51,271.74) 450.74,316.97 ; D2.1@392.95,358.27 cw(c362.63,358.27) 384.07,336.83 cw(c405.51,315.39) 405.51,345.71 cw(c405.51,305.88) 433.67,334.04 ; D2.1@428.07,358.27 ccw(c473.03,358.27) 441.24,326.48 ; S2.2@486.59,229.94 ccw(c463.73,252.8) 496.06,252.8 ; S2.2@496.06,212.6 496.06,271.65 ; 496.06,253.43 ccw(c529.94,253.43) S2.2@511.74,224.85 ; S2.2@517.11,233.29 cw(c541.55,271.65) 496.06,271.65
NetD3_2: D3.2 R12.2 | length 121.3
  Top Layer w10: D3.2 R12.2 ; D3.2@322.56,271.93 cw(c340.91,253.58) 340.91,279.53 cw(c340.91,305.48) D3.2@322.56,287.13 ; R12.2@356,273.32 ccw(c341.01,258.33) 341.01,279.53 ccw(c341.01,300.72) R12.2@356,285.74
NetD4_1: D4.1 R14.2 | length 220.6
  Top Layer w10: R14.2 519.69,590.55 D4.1@582.68,653.54 ; R14.2@502.27,584.34 cw(c517.26,569.36) 517.26,590.55 cw(c517.26,611.75) R14.2@502.27,596.76 ; D4.1@554.21,643.7 cw(c509.26,643.7) 541.04,611.91 cw(c572.83,580.12) D4.1@572.83,625.08
NetQ1_1: Q1.1 Q2.3 R1.2 | length 564.1
  Top Layer w15: R1.2 7.87,870.08 Q2.3 ; R1.2@-35.43,836.99 ccw(c-35.43,861.65) -17.99,844.21 ; Q2.3@-0.74,920.52 cw(c-21.54,899.72) 7.87,899.72 cw(c37.29,899.72) Q2.3@16.49,920.52
  Top Layer w20: Q2.3 33.46,954.72 ; Q2.3@8.45,936.43 cw(c52.63,892.26) 52.63,954.72 ; Q2.3@22.6,922.29 cw(c100.91,843.97) Q1.1@100.91,954.72 ; Q2.3@25.34,930.47 cw(c53.74,934.44) 33.46,954.72 ; 49.84,941.04 ccw(c38.45,983.53) Q1.1@76.55,961.54 ; Q1.1@65.01,945.1 cw(c70.64,924.06) Q1.1@81.54,942.93 ; Q1.1@78.71,945.09 ccw(c55.46,921.84) 55.46,954.72 ccw(c55.46,987.61) Q1.1@78.71,964.36 ; Q1.1 33.46,954.72
NetQ2_1: Q2.1 R5.2 R6.1 | length 416.1
  Top Layer w10: -171.31,938.92 ccw(c-193.02,960.63) R6.1@-162.32,960.63 ; -166.22,859.14 cw(c-194.65,830.71) R5.2@-154.45,830.71 ; R6.1@-161.81,948.43 cw(c-153.54,940.16) R6.1@-153.54,951.85 ; R6.1@-146.53,961.49 cw(c-129.61,944.57) -129.61,968.5 ; R5.2 -145.67,838.58 -185.04,877.95 -185.04,925.2 R6.1 -141.73,968.5 Q2.1 ; R6.1@-139.46,954.42 cw(c-105.46,920.42) Q2.1@-105.46,968.5 ; Q2.1@-97,958.12 ccw(c-122.07,933.05) -122.07,968.5 ccw(c-122.07,1003.96) Q2.1@-97,978.89
NetR7_1: R7.1 U2.7 | length 695.5
  Bottom Layer w12: U2.7 -536.22,811.81 -512.69,788.28 ; U2.7@-566.73,809.11 cw(c-550.23,788.58) -531.61,807.2 ; U2.7@-559.21,799.76 cw(c-541.8,778.09) -522.15,797.74 ; U2.7@-551.7,790.4 cw(c-533.37,767.6) -512.69,788.28 ; v1@-441.6,347.12 ccw(c-452.7,358.21) -437.01,358.21 ccw(c-421.32,358.21) v1@-432.41,347.12 ; v1(-437.01,342.52) -437.01,432.5 -490.87,486.36 -490.87,561.74 -512.69,583.56 -512.69,788.28
NetR12_1: R12.1 U4.1 | length 281.3
  Top Layer w10: U4.1 438.98,135.83 452.76,149.61 ; R12.1@423.98,275.59 ccw(c449.54,275.59) 431.46,257.51 ; R12.1 425.2,263.78 452.76,236.22 452.76,149.61 ; U4.1@426.49,132.71 ccw(c429.54,146.86) 439.77,136.62 ; U4.1@428.6,142.49 ccw(c434.14,168.22) 452.76,149.61 ; R12.1@433.98,275.59 ccw(c483.69,275.59) 448.54,240.44
NetR13_2: R13.2 U4.5 | length 229.8
  Top Layer w12: U4.5@317.74,131.72 cw(c307.82,121.8) 321.85,121.8 cw(c335.88,121.8) U4.5@325.96,131.72 ; 321.85,105.01 ccw(c368.79,105.01) R13.2@335.6,71.82 ; U4.5@321.85,133.98 ccw(c397.76,133.98) R13.2@344.08,80.3 ; U4.5 321.85,87.6 ; 327.97,111.14 cw(c346.94,116.22) U4.5@334.41,131.35 ; R13.2@337.41,82.49 cw(c334.67,100.42) 321.85,87.6 ; R13.2 321.85,87.6
NRST: C13.1 U3.7 | length 207.9
  Top Layer w10: -391.79,427.22 ccw(c-370.08,448.93) C13.1@-370.08,418.23 ; U3.7 -383.86,525.59 -401.57,507.87 -401.57,437.01 C13.1
SWCLK: J3.2 U3.37 | length 1117.6
  Top Layer w10: -591.43,839.7 cw(c-581.1,829.37) U3.37@-581.1,843.98 ; U3.37@-570.87,844.49 -586.64,844.49 -600.42,830.71 -600.42,154.54 -579.99,134.11 -374.27,134.11 J3.2 ; J3.2@-329.65,70.87 ccw(c-374.6,70.87) -342.81,102.66 ccw(c-311.02,134.45) J3.2@-311.02,89.49
SWDIO: J3.4 U3.34 | length 1332
  Top Layer w10: v1@-601.99,874.02 cw(c-620.09,874.02) -607.29,861.21 cw(c-594.49,848.41) v1@-594.49,866.52 ; v1(-594.49,874.02) -616.42,852.08 -616.42,147.92 -586.61,118.11 -515.75,118.11 J3.4 ; J3.4@-487.13,70.87 ccw(c-532.08,70.87) -500.29,102.66 ccw(c-468.5,134.45) J3.4@-468.5,89.49 ; -462.6,863.07 ccw(c-424.33,863.07) v1@-451.39,836.01 ; U3.34 -462.6,836.61 v1(-456.69,830.71)
  Bottom Layer w10: v1(-594.49,874.02) -531.5,874.02 -488.19,830.71 v1(-456.69,830.71) ; v1@-589.18,868.71 cw(c-576.38,855.91) -576.38,874.02 cw(c-576.38,892.12) v1@-589.18,879.32 ; v1@-462,825.41 ccw(c-474.8,812.6) -474.8,830.71 ccw(c-474.8,848.82) v1@-462,836.01
TTL1_RX: U2.5 U3.31 | length 1215.2
  Top Layer w10: -403.54,855.41 ccw(c-384.75,855.41) v2@-398.04,842.12 ; U3.31 -403.54,840.55 v2(-401.57,838.58)
  Bottom Layer w10: U2.5 -507.87,544.88 -507.87,479.32 -460.51,431.95 -460.51,332.79 -446.74,319.02 -427.27,319.02 -413.39,332.91 -413.39,555.12 -350.65,617.86 -350.65,787.65 v2(-401.57,838.58) ; U2.5@-568.9,583.35 cw(c-568.9,528.88) -530.39,567.39 ; U2.5@-568.9,593.35 cw(c-568.9,563.03) U2.5@-547.46,584.47 ; U2.5@-550.43,611.81 ccw(c-491.6,611.81) -533.2,570.21 ; U2.5@-540.43,611.81 ccw(c-457.46,611.81) -516.13,553.14 ; v2@-401.57,833.58 cw(c-401.57,821.51) -393.04,830.05 cw(c-384.5,838.58) v2@-396.57,838.58
TTL1_TX: U2.4 U3.30 | length 1171.2
  Top Layer w10: U3.30 -383.86,856.3 v2(-362.2,834.65) ; v2@-367.2,834.65 ccw(c-379.28,834.65) -370.74,843.18 ccw(c-362.2,851.72) v2@-362.2,839.65
  Bottom Layer w10: U2.4 -562.99,511.81 -476.51,425.33 -476.51,326.16 -453.37,303.02 -420.65,303.02 -397.39,326.28 -397.39,548.49 -334.65,611.23 -334.65,807.09 v2(-362.2,834.65) ; U2.4@-568.9,483.35 cw(c-568.9,400.37) -510.22,459.04 ; U2.4@-568.9,493.35 cw(c-568.9,434.51) -527.3,476.11 ; U2.4@-550.43,511.81 ccw(c-520.11,511.81) U2.4@-541.55,490.37 ; U2.4@-540.43,511.81 ccw(c-485.97,511.81) -524.48,473.3 ; v2@-362.2,829.65 cw(c-362.2,817.57) -353.67,826.11 cw(c-345.13,834.65) v2@-357.2,834.65
VBUS: C8.1 D3.1 J2.1 U4.4 | length 607.7
  Top Layer w15: J2.1 -51.18,208.66 -27.56,232.28 228.35,232.28 C8.1@251.97,208.66 ; 238.46,222.17 cw(c221.02,204.72) C8.1@245.69,204.72 ; D3.1@246.14,271.73 cw(c232.06,257.65) 251.97,257.65 cw(c271.88,257.65) D3.1@257.8,271.73 ; C8.1@246.95,207.77 ccw(c234.84,219.88) 251.97,219.88 ; D3.1 C8.1@251.97,208.66 ; C8.1@264.86,201.68 cw(c286.48,180.06) 286.48,210.63 ; U4.4 261.81,210.63 C8.1 C8.1@251.97,208.66
XTAL: U3.5
YL_ENOUT: R3.1 U2.3 | length 286.1
  Bottom Layer w12: U2.3 -569.29,411.81 v1@-500,342.52 ; U2.3@-568.9,384.35 cw(c-568.9,318.99) -522.68,365.2 ; U2.3@-568.9,396.35 cw(c-568.9,359.96) U2.3@-543.17,385.69 ; U2.3@-553.43,411.81 ccw(c-515.15,411.81) U2.3@-542.22,384.74 ; U2.3@-541.43,411.81 ccw(c-474.18,411.81) -521.73,364.25 ; -517.82,360.34 cw(c-535.63,342.52) v1@-510.44,342.52
  other v1: -503.94,342.52
pads on no net: J2.2 J2.3 J2.4 S2. U2.6 U3.2 U3.3 U3.4 U3.6 U3.11 U3.12 U3.15 U3.16 U3.18 U3.19 U3.20 U3.21 U3.22 U3.25 U3.26 U3.27 U3.28 U3.29 U3.32 U3.33 U3.38 U3.39 U3.40 U3.41 U3.42 U3.43 U3.45 U3.46

## Polygon pours and split planes (outlines as drawn)
GND on Bottom Layer "Bottom Layer-No Net" (solid, remove dead copper, pour order 13): -629.92,1023.62 629.92,1023.62 629.92,0 -629.92,0

## Keep-outs
Keep-Out Layer:
  the board outline again, w5

## Silkscreen, mask and mechanical layers (free items; w line width, h text height)
Bottom Overlay:
  text "+" at -133.86,43.31 h60
  text "+" at 224.41,43.31 h60

## Dimensions
-629.92,0 to 629.92,0 on Keep-Out Layer
-629.92,1023.62 to -629.92,0 on Keep-Out Layer